# Altium PCB PCB3.PcbDoc
Units mil, origin at the board's own origin, x right, y up, seen from the top; angles counter-clockwise.
Board outline 2126.15 x 984.42 mil, 2 copper layers (Top Layer, Bottom Layer); 9 components, 30 nets, 117 pads, 45 vias.
Unrouted connection lines stored in the file: 4.
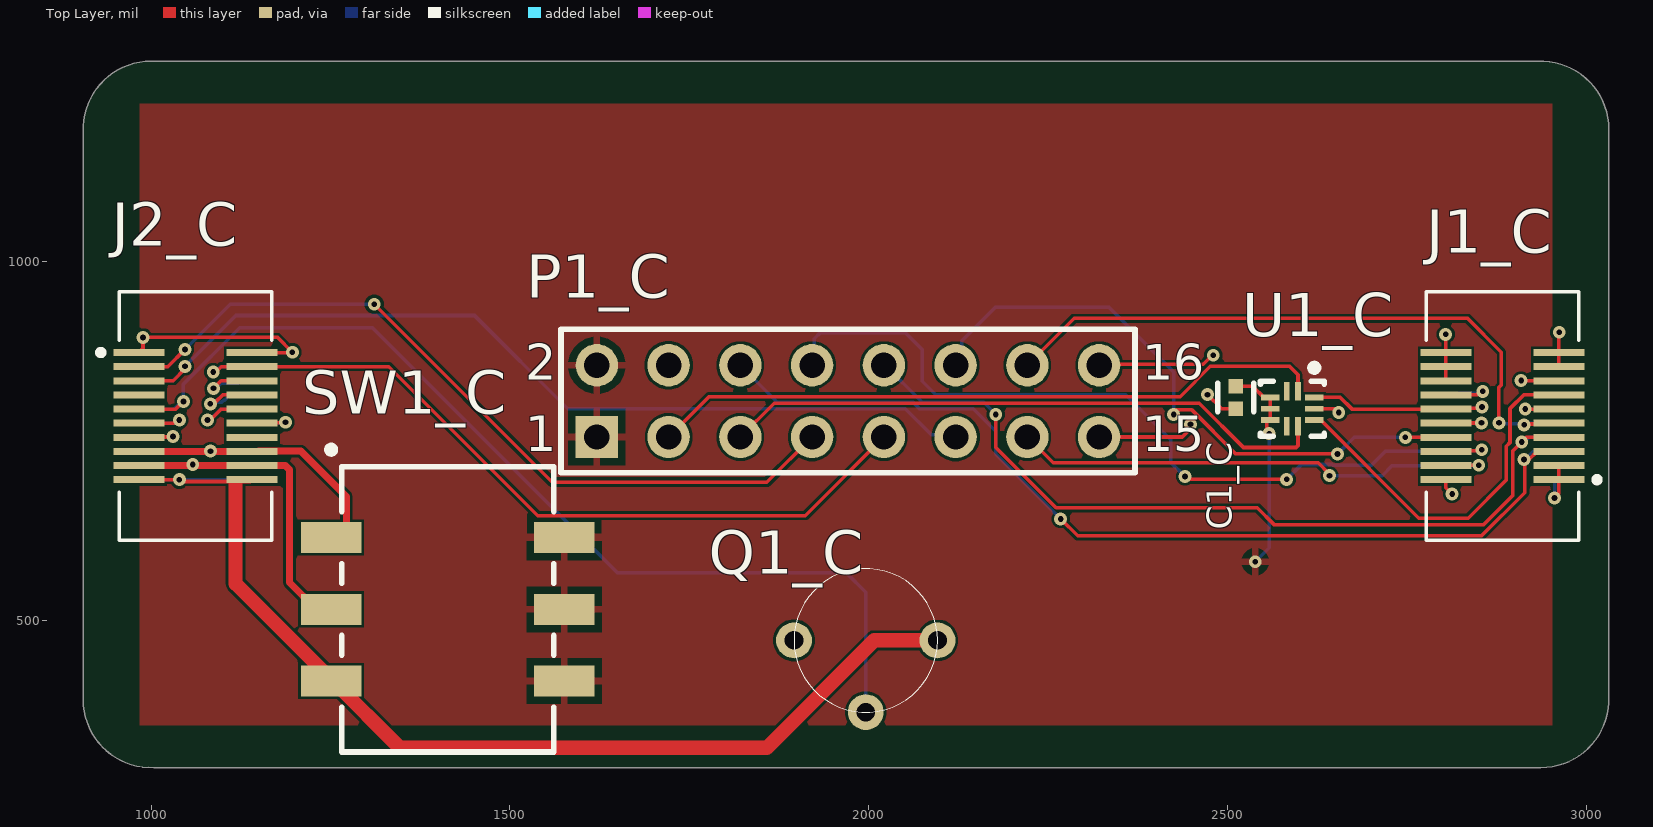
[diagram p0: Top Layer view]
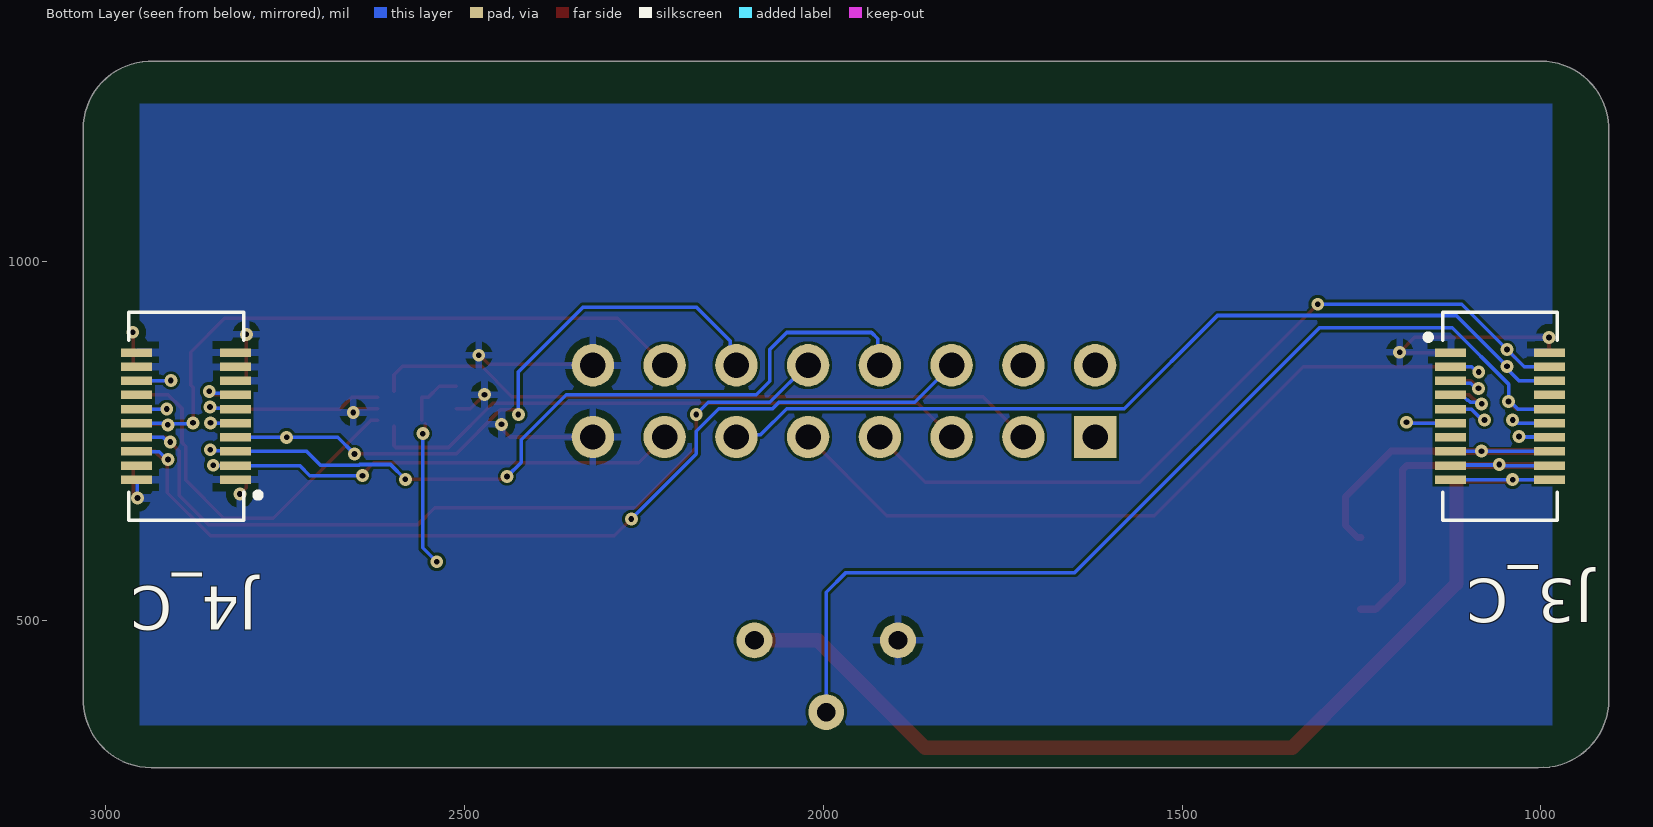
[diagram p1: Bottom Layer view, seen from below]
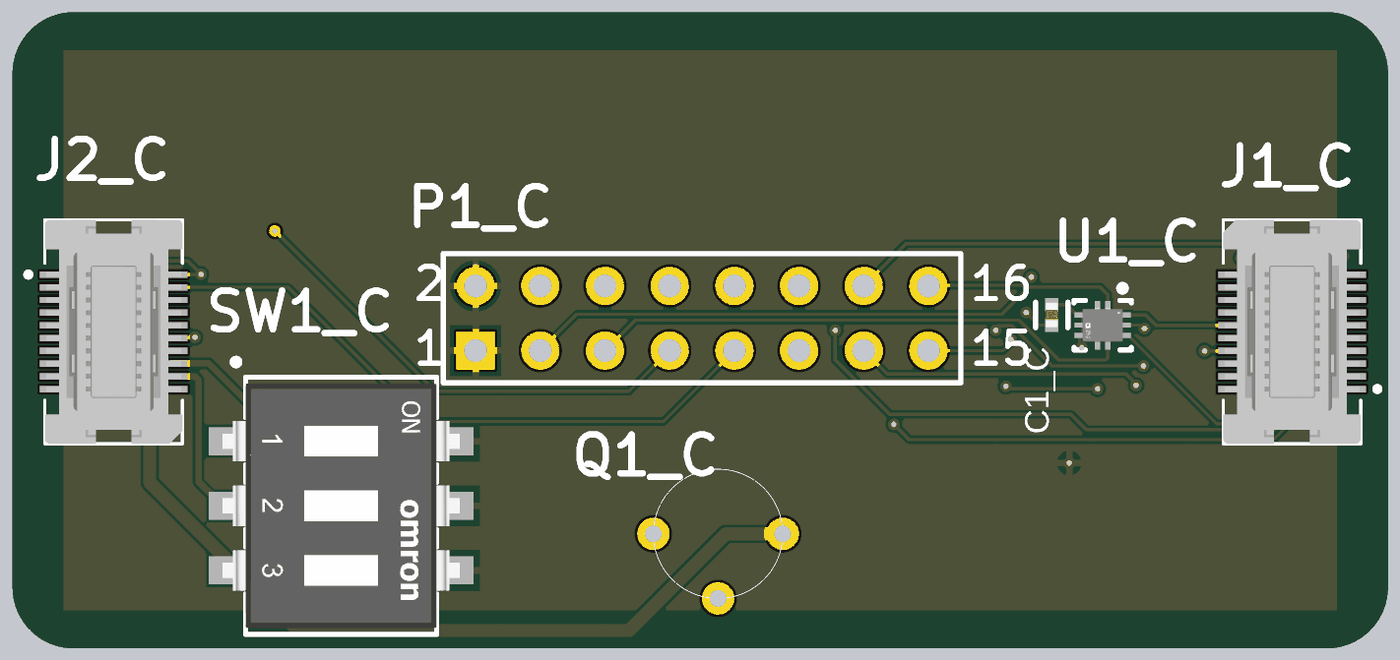
[diagram p2: 3D render of the assembled board from above, using the file's embedded part models]

## Layer stack, top to bottom
Top Solder: solder mask 0.4, Solder Resist, Dk 3.5
Top Layer: signal copper 1.4
Dielectric 1: dielectric 12.6, FR-4, Dk 4.8
Bottom Layer: signal copper 1.4
Bottom Solder: solder mask 0.4, Solder Resist, Dk 3.5

## Board outline
905.51,389.85 905.51,1181.1 cw(c1000,1185.04) 1000,1279.61 2932.99,1279.61 2933.07,1279.53 cw(c2937.01,1185.04) 3031.58,1185.04 3031.58,393.78 3031.5,393.7 cw(c2937.01,389.76) 2937.01,295.19 1004.02,295.19 1003.94,295.28 cw(c1000,389.76)

## Design rules (kind name [scope] priority, off if disabled: settings)
Clearance [All] p1: gap=4 ignorepadtopadclearanceinfootprint=FALSE
PolygonConnect [All] p1: connectstyle=Relief reliefconductorwidth=10 reliefentries=4 polygonreliefangle="90 Angle" airgapwidth=10
RoutingVias [All] p1: holewidth=8 width=18 viastyle="Through Hole" minholewidth=8 minwidth=18 maxholewidth=28 maxwidth=50
SolderMaskExpansion [All] p1: expansion=4 istentingtop=FALSE
Width [All] p1: maxlimit=50 minlimit=4 preferedwidth=5
30 further rules are at their usual default settings.

## Components (designator, comment, footprint, x,y, rotation, side; value= is the part's Value field where it differs from the comment)
C1_C "C0402C104K8PACTU" FP-C0402-BB-MFG 2511.81,811.02 r270 top value="0.10 μF"
J1_C "52991-0208" MOLEX_52991-0208 2883.24,785 r90 top
J2_C "52991-0208" MOLEX_52991-0208 1061.76,785 r270 top
J3_C "53916-0208" "MOLEX-  539160208" 1047,785 r270 bottom
J4_C "53916-0208" "MOLEX-  539160208" 2898,785 r90 bottom
P1_C "Header 8X2" HDR2X8 1621.26,755.91 r0 top
Q1_C "AMN2111" AMN21111 1996.06,472.44 r90 top
SW1_C "A6SN-3101" FP-A6SN-3101-MFG 1413.39,515.75 r270 top
U1_C "ADG824BCPZ-REEL7" FP-CP-10-10-MFG 2590.55,795.28 r270 top

## Footprints (in the part's own frame and the unit in brackets; to place one, negate y for a bottom-side part, rotate by r counter-clockwise, add the part's x,y. Pads: shape width x height; smd on the part's side, far side on the other; paste and mask are expansions set on the pad)
AMN21111 [mil]
  round 50 hole 26: 1(0,-100) 2(0,100) 3(-100,0)
  silkscreen extent -100,-100 100,100
FP-A6SN-3101-MFG [mm]
  rect 1.1x2.15 smd paste+0 mask+0: 1(-2.54,-4.125) 2(0,-4.125) 3(2.54,-4.125) 4(2.54,4.125) 5(0,4.125) 6(-2.54,4.125)
  silkscreen extent -5.77,-4.25 5.05,3.75, body extent -5.15,-5.3 5.15,5.3, height 0.25
FP-C0402-BB-MFG [mm]
  rect 0.52x0.52 smd paste+0 mask+0: 1(-0.4,0) 2(0.4,0)
  silkscreen extent -0.5,-0.64 0.5,0.64, body extent -0.8,-0.4 0.8,0.4, height 0.25
FP-CP-10-10-MFG [mm]
  rect 0.2x0.655 smd paste+0 mask+0: 1(-0.4,0.777) 4(-0.4,-0.777) 5(0,-0.777) 6(0.4,-0.777) 9(0.4,0.777) 10(0,0.777)
  rect 0.655x0.2 smd paste+0 mask+0: 2(-0.627,0.2) 3(-0.627,-0.2) 7(0.627,-0.2) 8(0.627,0.2)
  silkscreen extent -1.57,-1.12 0.97,1.12, body extent -1.05,-1.2 1.05,1.2, height 0.25
HDR2X8 [mm] "Connector; Header; 8x2 Position"
  rect 1.5x1.5 hole 0.9: 1(0,0)
  round 1.5 hole 0.9: 2(0,2.54) 3(2.54,0) 4(2.54,2.54) 5(5.08,0) 6(5.08,2.54) 7(7.62,0) 8(7.62,2.54) 9(10.16,0) 10(10.16,2.54) 11(12.7,0) 12(12.7,2.54) 13(15.24,0) 14(15.24,2.54) 15(17.78,0) 16(17.78,2.54)
  silkscreen extent -1.27,-1.27 19.05,3.81
"MOLEX-  539160208" [mm]
  rect 0.3x1.1 smd: 1(-2.25,1.5) 2(-2.25,-2) 3(-1.75,1.5) 4(-1.75,-2) 5(-1.25,1.5) 6(-1.25,-2) 7(-0.75,1.5) 8(-0.75,-2) 9(-0.25,1.5) 10(-0.25,-2) 11(0.25,1.5) 12(0.25,-2) 13(0.75,1.5) 14(0.75,-2) 15(1.25,1.5) 16(1.25,-2) 17(1.75,1.5) 18(1.75,-2) 19(2.25,1.5) 20(2.25,-2)
  silkscreen extent -3.68,-2.89 3.68,1.78, body extent -3.65,-2.3 3.65,1.8, height 3.46
MOLEX_52991-0208 [mm]
  rect 0.25x1.8 smd: 1(-2.25,-2) 2(-2.25,2) 3(-1.75,-2) 4(-1.75,2) 5(-1.25,-2) 6(-1.25,2) 7(-0.75,-2) 8(-0.75,2) 9(-0.25,-2) 10(-0.25,2) 11(0.25,-2) 12(0.25,2) 13(0.75,-2) 14(0.75,2) 15(1.25,-2) 16(1.25,2) 17(1.75,-2) 18(1.75,2) 19(2.25,-2) 20(2.25,2)
  silkscreen extent -4.4,-3.45 4.4,2.7, body extent -4.4,-2.7 4.4,2.7, height 2.28

## Part data
C1_C: library part CMP-2008-02046-2, "CAP CER 0.1UF 10V X5R 0402", Capacitance="0.10 μF", Manufacturer=Kemet, Package=C0402-BB, Temperature="-55°C to +125°C", Temperature Characteristic=X5R, Temperature Coefficient=15%, Temperature Range High=+125°C, Temperature Range Low=-55°C, Tolerance=0.1, Voltage Rating="10 V", Automotive=No, Category=Cap, ComponentLink2Description=Datasheet, ComponentLink2URL=https://content.kemet.com/datasheets/KEM_C1002_X7R_SMD.pdf, Device Class L1="Passive Components", Device Class L2=Capacitors, Device Class L3="Ceramic Capacitors", Digikey Description="CAP CER 0.1UF 10V X5R 0402", Height=0.55mm, Ipc Land Pattern Name=CAPC10050X50, Lead Free=Yes, Manufacturer Part Number=C0402C104K8PACTU, Material=Ceramic, Mouser Description="Capacitor 100 nF 10 VDC 0402", Octopart=https://octopart.com/c0402c104k8pactu-kemet-140039, RoHS=TRUE
J1_C J2_C: "20 Position Connector Receptacle, Center Strip Contacts Surface Mount Gold", Package=None, Availability=Unavailable, MF=Molex, MP=52991-0208, Price=None, SnapEDA_Link=https://www.snapeda.com/parts/52991-0208/Molex/view-part/230631/?ref=snap
P1_C: "Header, 8-Pin, Dual row", LatestRevisionDate=17-Jul-2002, LatestRevisionNote="Re-released for DXP Platform.", Publisher="Altium Limited"
SW1_C: library part CMP-08827-000007-1, "SWITCH SLIDE DIP SPST 25MA 24V", Ambient Temperature Range High=+85°C, Ambient Temperature Range Low=-30°C, Contact Resistance=200mΩ, Current Rating=25mA, Manufacturer="Omron Electronics Inc-EMC Div", Temperature="-30°C to +85°C", Voltage Rating Dc=24V, Automotive=No, Category=Switch, ComponentLink2Description=Datasheet, ComponentLink2URL=https://omronfs.omron.com/en_US/ecb/products/pdf/en-a6sn.pdf, Device Class L1=Electromechanical, Device Class L2=Switches, Device Class L3="DIP Switches", Digikey Description="SWITCH SLIDE DIP SPST 25MA 24V", Electromechanical Life=1000Cycles, Height=4.55mm, Lead Free=Yes, Manufacturer Part Number=A6SN-3101, Mouser Description="DIP Switches / SIP Switches 3P Knife-Edge, 2.3mm Slide SMT Flat-Act", Number Of Circuits=3, Octopart=https://octopart.com/a6sn-3101-omron-55396000, Package=A6SN-3101, RoHS=TRUE, Standoff Height=0.7mm, Temperature Range High=+85°C, Temperature Range Low=-30°C, Throw Configuration=SPST
U1_C: library part CMP-09113-000012-1, "IC SWITCH DUAL SPDT 10LFCSP", Manufacturer="Analog Devices", Max Supply Voltage=3.6V, Min Supply Voltage=1.65V, Nominal Supply Current=0.003uA, On State Resistance=0.5Ω, Package=CP-10-10, Temperature="-40°C to +85°C", Temperature Range High=+85°C, Temperature Range Low=-40°C, -3Db Bandwith=90MHz, Automotive=No, Category=IC, ComponentLink2Description=Datasheet, ComponentLink2URL=https://www.analog.com/media/en/technical-documentation/data-sheets/ADG824.pdf, Device Class L1="Integrated Circuits (ICs)", Device Class L2="Interface ICs", Device Class L3="Analog Switches", Digikey Description="IC SWITCH DUAL SPDT 10LFCSP", Footprint Url=https://www.analog.com/media/en/symbols-footprints/symbols/ADG824BCPZ-REEL7.bxl, Height=0.6mm, Interface=LVCMOS, Lead Free=Yes, Manufacturer Part Number=ADG824BCPZ-REEL7, Mux Demux Ratio=1:2, Number Of Circuits=2, Octopart=https://octopart.com/adg824bcpz-reel7-analog+devices-12410880, RoHS=TRUE, Standoff Height=0.02mm, Throw Configuration=SPDT

## Via types
v1: diameter 18, hole 8, Top Layer to Bottom Layer, 43 vias
v2: diameter 18, hole 8, Top Layer to Bottom Layer, tented both sides, 2 vias

## Nets (pads, with @x,y where several pads share a name; then routed paths per layer and width w, separated by ;. In a path a pad name is that pad's centre, name@x,y a point inside that pad or via, vN(x,y) a via of type N, cw(c..) or ccw(c..) an arc to the next point about the centre after c; other vN are vias at no path point)
AIN6: J2_C.8 J3_C.8 | length 111.3
  Top Layer w5: v1(1082.62,802.1) 1085.11,804.59 1089.82,804.59 1099.76,814.53 J2_C.8
  Bottom Layer w5: v1(1082.62,802.1) 1085.11,804.59 1098.63,804.59 1101.28,807.25 1102.71,807.25 1109.99,814.53 J3_C.8
AIN7: J2_C.9 J3_C.9 Q1_C.3 | length 1455.2
  Top Layer w5: J2_C.9 1034.51,794.84 v1(1045.07,805.4)
  Bottom Layer w5: J3_C.9 1032.29,794.84 1042.84,805.4 v1(1045.07,805.4) 1045.07,829.66 1123.35,907.94 1308.59,907.94 1649.61,566.93 1968.5,566.93 1996.06,539.37 Q1_C.3
CAM_D0: J1_C.4 J4_C.4 P1_C.13 | length 704.8
  Top Layer w5: P1_C.13 2257.29,719.88 2626.58,719.88 2642.25,704.2 v1(2642.25,702.07) ; J1_C.4 2804.71,716.32 2850.18,716.32 v1(2850.39,716.54)
  Bottom Layer w5: v1(2642.25,702.07) 2715.92,702.07 2729.95,716.1 2849.96,716.1 v1(2850.39,716.54)
CAM_D1: J1_C.5 J4_C.5 P1_C.6 | length 1377.4
  Top Layer w5: v1(2267.72,641.73) 2291.34,618.11 2854.33,618.11 2914.51,678.29 v1@2914.51,718.83 ; v1(2913.39,724.41) 2913.97,725 2920.67,725 2931.46,735.79 J1_C.5
  Bottom Layer w5: P1_C.6 1872.89,804.28 2061.87,804.28 2070.87,795.28 2145.67,795.28 2177.17,763.78 2177.17,732.28 v1(2267.72,641.73) ; v1(2913.39,724.41) 2914.72,724.41 2925.72,735.41 2956.68,735.41 J4_C.5
CAM_D2: J1_C.6 J4_C.6 P1_C.8 | length 1170.1
  Top Layer w5: v1(2440.94,700.79) 2444.88,696.85 v1(2582.68,696.85) ; J1_C.6 2805.67,736.96 2853.43,736.96 v1(2854.6,738.13)
  Bottom Layer w5: P1_C.8 1924.43,859.07 1924.43,892.93 1933.07,901.57 2051.18,901.57 2074.8,877.95 2074.8,833.64 2093.48,814.96 2358.27,814.96 2421.26,751.97 2421.26,720.47 v1(2440.94,700.79) ; v1(2582.68,696.85) 2603.4,717.57 2646.34,717.57 2647.12,716.78 2701.04,716.78 2720.04,735.79 J4_C.6 2820.43,736.96 2853.43,736.96 v1(2854.6,738.13)
CAM_D3: J1_C.7 J4_C.7 P1_C.10 | length 1195.9
  Top Layer w5: v2(2177.17,787.4) 2177.17,741.36 2261.3,657.23 2541.59,657.23 2564.96,633.86 2857.35,633.86 2897.89,674.39 2897.89,736.47 2916.89,755.47 J1_C.7
  Bottom Layer w5: P1_C.10 2022.96,855.91 2074.59,804.28 2160.29,804.28 v2(2177.17,787.4) ; v1(2910.27,748.85) 2913.79,748.85 2920.41,755.47 J4_C.7
CAM_HREF: J2_C.4 J3_C.4 P1_C.9 | length 1111.4
  Top Layer w5: v1(1086.61,846.46) 1090.13,846.46 1097.57,853.9 J2_C.4 1331.14,853.9 1538.82,646.22 1911.57,646.22 P1_C.9
  Bottom Layer w5: v1(1086.61,846.46) 1089.15,846.46 1096.59,853.9 J3_C.4
CAM_INT: J1_C.9 J4_C.9 P1_C.14 | length 936.3
  Top Layer w5: P1_C.14 2286.61,921.26 2834.65,921.26 2881.89,874.02 2881.89,828.28 2878.45,824.84 v1(2878.45,775.59) ; v1(2913.66,772.9) 2914.79,774.03 2960.85,774.03 J1_C.9
  Bottom Layer w5: v1(2878.45,775.59) 2879.8,774.24 2912.32,774.24 v1(2913.66,772.9) ; v1@2913.49,775.27 2956.95,775.27 J4_C.9
CAM_PCLK: J2_C.5 J3_C.5 P1_C.11 | length 1317.8
  Top Layer w5: J2_C.5 983.24,834.43 1030.86,834.43 1047.24,850.81 v1(1047.24,854.33)
  Bottom Layer w5: J3_C.5 1030.64,834.21 1047.24,850.81 v1(1047.24,854.33) 1118.11,925.2 1450.79,925.2 1580.71,795.28 2051.18,795.28 2087.16,759.3 2117.87,759.3 P1_C.11
CAM_SCL: P1_C.3 U1_C.2 | length 945.4
  Top Layer w5: P1_C.3 1777.5,812.15 2434.2,812.15 2476.38,854.33 2586.61,854.33 2598.43,842.52 U1_C.2
CAM_SDA: P1_C.5 U1_C.8 | length 850
  Top Layer w5: P1_C.5 1868.5,803.15 2460.63,803.15 2522.5,741.28 2595.61,741.28 2598.43,744.09 U1_C.8
CAM_TRIG: J1_C.8 J4_C.8 P1_C.12 | length 939.7
  Top Layer w5: v2(2425.2,787.4) 2425.2,790.92 2428.13,793.85 2428.13,794.15 2449.94,794.15 2511.81,732.28 v1(2653.54,732.28) ; v1(2748,755.47) J1_C.8
  Bottom Layer w5: P1_C.12 2129.84,864.49 2129.84,889.69 2177.17,937.01 2334.65,937.01 2425.2,846.46 v2(2425.2,787.4) ; v1(2653.54,732.28) 2676.73,755.47 v1(2748,755.47) J4_C.8
CAM_VSYNC: J2_C.3 J3_C.3 P1_C.7 | length 1172.4
  Top Layer w5: J2_C.3 1023.19,853.9 v1(1047.24,877.95) ; v1(1311.02,940.94) 1559.06,692.91 1858.27,692.91 P1_C.7
  Bottom Layer w5: J3_C.3 1023.19,853.9 1110.24,940.94 v1(1311.02,940.94)
GND: C1_C.2 J1_C.1 J1_C.2 J1_C.3 J1_C.16 J1_C.17 J1_C.18 J1_C.19 J1_C.20 J2_C.1 J2_C.2 J3_C.1 J3_C.2 J4_C.1 J4_C.2 J4_C.3 J4_C.16 J4_C.17 J4_C.18 J4_C.19 J4_C.20 P1_C.15 P1_C.16 Q1_C.2 U1_C.10 | length 897.6
  Top Layer w5: J2_C.1 988.68,879.24 v1(988.68,894.73) 1176.14,894.73 v1(1196.85,874.02) 1196.42,873.58 J2_C.2 ; P1_C.15 2437.01,755.91 2448.61,767.51 v1(2448.59,773.59) ; P1_C.16 2322.44,857.09 2466.19,857.09 2478.93,869.83 v1(2480.32,869.83) ; v1(2472.44,814.96) 2492.13,795.28 C1_C.2 ; U1_C.10 2650.03,795.28 v1(2655.23,790.08) ; v1(2804.3,899.01) 2804.5,898.82 J1_C.20 J1_C.18 J1_C.16 ; J1_C.2 2804.5,685.25 v1(2813.27,676.48) ; v1(2956.07,670.78) 2961.98,676.69 J1_C.1 J1_C.3 ; J1_C.17 J1_C.19 2961.98,901.27 v1(2962.6,901.9)
  Bottom Layer w5: v1(2956.07,670.78) 2956.07,693.01 2959.48,696.42 J4_C.1@2961.98,696.42
PCIF_D6: J1_C.10 J4_C.10 | length 85.3
  Top Layer w5: J1_C.10 2804.71,775.37 2854.11,775.37 v1(2854.33,775.59)
  Bottom Layer w5: J4_C.10 2853.9,775.16 v1(2854.33,775.59)
PCIF_D7: J1_C.11 J4_C.11 | length 88.7
  Top Layer w5: v1(2915.19,794.84) J1_C.11
  Bottom Layer w5: v1(2915.19,794.84) J4_C.11
PCIF_D8: J1_C.12 J4_C.12 U1_C.1 | length 278.4
  Top Layer w5: U1_C.1 2657.48,811.02 2673.66,794.84 J1_C.12 2805.87,796.21 2853.57,796.21 v1(2854.94,797.58)
  Bottom Layer w5: J4_C.12 2820.63,796.21 2853.57,796.21 v1(2854.94,797.58)
PCIF_D9: J1_C.13 J4_C.13 U1_C.9 | length 523.9
  Top Layer w5: U1_C.9 2630.11,779.53 2766.78,642.86 2835.77,642.86 2888.89,695.97 2888.89,743.22 2893.95,748.28 2893.95,795.52 2912.95,814.53 J1_C.13
PDOWN: J2_C.12 J3_C.12 | length 109.7
  Top Layer w5: J2_C.12 1141.15,775.81 1186.79,775.81 v1(1187.44,776.46)
  Bottom Layer w5: J3_C.12 1186.14,775.16 v1(1187.44,776.46)
PT0: J2_C.10 J3_C.10 | length 121.5
  Top Layer w5: v1(1078.74,779.53) 1082.26,779.53 1097.57,794.84 J2_C.10
  Bottom Layer w5: v1(1078.74,779.53) 1081.97,779.53 1097.28,794.84 J3_C.10
PT1: J2_C.11 J3_C.11 | length 111.4
  Top Layer w5: J2_C.11 1031.48,775.16 1035.85,779.53 v1(1039.37,779.53)
  Bottom Layer w5: J3_C.11 1031.48,775.16 1035.85,779.53 v1(1039.37,779.53)
SQWOUT: J2_C.13 J3_C.13 | length 90.6
  Top Layer w5: J2_C.13 983.51,755.96 1029.89,755.96 v1(1030.38,756.45)
  Bottom Layer w5: J3_C.13 988.43,755.96 1029.89,755.96 v1(1030.38,756.45)
TMR3A_IOA: J1_C.14 J4_C.14 | length 92.2
  Top Layer w5: J1_C.14 2847.35,814.53 2852.38,819.56 v1(2855.9,819.56)
  Bottom Layer w5: J4_C.14 2821.81,817.07 2853.41,817.07 v1(2855.9,819.56)
TMR3A_IOB: J1_C.15 J4_C.15 | length 100.5
  Top Layer w5: v1(2909.45,834.65) 2909.67,834.43 2961.76,834.43 J1_C.15
  Bottom Layer w5: v1(2909.45,834.65) 2909.67,834.43 2956.84,834.43 J4_C.15
UART2_RX: J2_C.7 J3_C.7
UART2_TX: J2_C.6 J3_C.6 | length 101
  Top Layer w5: v1(1086.98,823.67) 1097.52,834.21 J2_C.6
  Bottom Layer w5: v1(1086.98,823.67) 1090.5,823.67 1097.64,830.81 1122.33,830.81 J3_C.6
VCC: C1_C.1 P1_C.1 P1_C.2 SW1_C.4 SW1_C.5 SW1_C.6 U1_C.4 U1_C.5 U1_C.6 | length 288.2
  Top Layer w5: C1_C.1 2535.24,826.77 2550.99,811.02 U1_C.4 U1_C.5 U1_C.6 ; 2554.94,774.53 2554.94,763.93 v1(2558.3,760.58)
  Bottom Layer w5: v1(2538.87,582.05) 2538.75,582.05 2558.3,601.61 v1(2558.3,760.58)
VCC_4: J2_C.15 J2_C.16 J3_C.15 J3_C.16 SW1_C.1 | length 522.3
  Top Layer w10: J2_C.15 J2_C.16 1149.17,735.79 1149.61,736.22 1208.66,736.22 1272.18,672.7 1272.18,632.4 1255.53,615.75 SW1_C.1
  Bottom Layer w5: J3_C.15 v1@1082.68,735.79 ; v1(1082.68,736.22) v1@1082.68,735.79 ; J3_C.16 v1@1082.68,735.79
VCC_5: J2_C.17 J2_C.18 J3_C.17 J3_C.18 SW1_C.2 | length 582
  Top Layer w10: J2_C.17 1058.04,716.1 1187.06,716.1 1192.91,710.24 1192.91,553.15 1230.31,515.75 SW1_C.2
  Bottom Layer w5: J3_C.17 1056.56,716.1 v1(1058.04,717.58) 1058.78,716.84 1125,716.84 J3_C.18
VCC_6: J2_C.19 J2_C.20 J3_C.19 J3_C.20 Q1_C.1 SW1_C.3 | length 1591.2
  Top Layer w5: J2_C.19 v1(1039.37,696.42) 1041.94,693.85 1137.93,693.85 J2_C.20 1138.08,698.84 J2_C.20@1120.62,694.81
  Top Layer w20: 1117.68,688.98 1117.68,551.61 1253.54,415.75 1346.46,322.83 1858.27,322.83 2007.87,472.44 Q1_C.1
  Bottom Layer w5: J3_C.19 v1(1039.37,696.42) J3_C.20
pads on no net: J2_C.14 J3_C.14 P1_C.4 U1_C.3 U1_C.7

## Polygon pours and split planes (outlines as drawn)
GND on Bottom Layer "GND_L02_P000" (solid, pour order 0): 984.25,1220.47 984.25,354.33 2952.76,354.33 2952.76,1220.47
VCC on Top Layer "VCC_L01_P001" (solid, pour order 1): 2952.76,1220.47 2952.76,354.33 984.25,354.33 984.25,1220.47

## Silkscreen, mask and mechanical layers (free items; w line width, h text height)
Mechanical 1:
  lines w1: 905.43,389.76 ccw(c1000,389.76) 1003.94,295.28 ; 905.51,389.85 905.51,1181.1 cw(c1000,1185.04) 1000,1279.61 2932.99,1279.61 ; 1004.02,295.19 2937.01,295.19 ccw(c2937.01,389.76) 3031.5,393.7 ; 2933.07,1279.53 cw(c2937.01,1185.04) 3031.58,1185.04 3031.58,393.78

## Text inside footprints (layer, text, board x,y; h text height)
P1_C: Top Overlay "2" at 1521.26,835.91 h50; Top Overlay "1" at 1521.26,735.91 h50; Top Overlay "15" at 2381.26,735.91 h50; Top Overlay "16" at 2381.26,835.91 h50